# EAGLE board motor_geared (EAGLE 5.11)

Size 12 x 13 mm. Coordinates in mm from the lower left corner, seen from the top.
Outline: 9,3.45 arc-180 9,9.55 11,9.55 arc90 12,10.55 12,12 arc90 11,13 8.26,13 arc29 7.77,12.87 0.51,8.79 arc61 0,7.92 0,5.08 arc61 0.51,4.21 7.77,0.13 arc29 8.26,0 11,0 arc90 12,1 12,2.45 arc90 11,3.45 9,3.45
Copper layers (1*16): Top 0.035mm / dielectric 1.5mm / Bottom 0.035mm
Design rules "default": minimum track width 10mil, minimum drill 24mil, track to track 8mil, track to pad 8mil, pad to pad 8mil, via to via 8mil, smd to smd 8mil, copper to edge 40mil, drill to drill 8mil, minimum pad ring 10mil, minimum via ring 8mil, stop-mask expansion 4mil, vias tented up to drill 0mil, thermal gap 10mil

## Footprints (pad centres in the part's own frame; a part is rotated, then mirrored left to right if it is on the bottom)
SLOT_SM = drill 0.356 round: M 0.94,1.372; N 2.032,1.372; O 3.099,1.372; P 3.81,0.559; Q 0.94,-1.372; R 2.032,-1.372; S 3.099,-1.372; T 3.81,-0.559 | smd 5.715 x 3.81: P$1 2.845,0

## Placement (x,y rotation side)
GND  SLOT_SM  [SLOT_SM]  0,6.5 0 top

## Library data of the parts
GND = NSL_MiniQuad